# Altium PCB 主板.PCBDOC
Units mil, origin at the board's own origin, x right, y up, seen from the top; angles counter-clockwise.
Board outline 7765 x 6617 mil, 2 copper layers (Top Layer, Bottom Layer); 30 components, 69 nets, 253 pads, 53 vias.
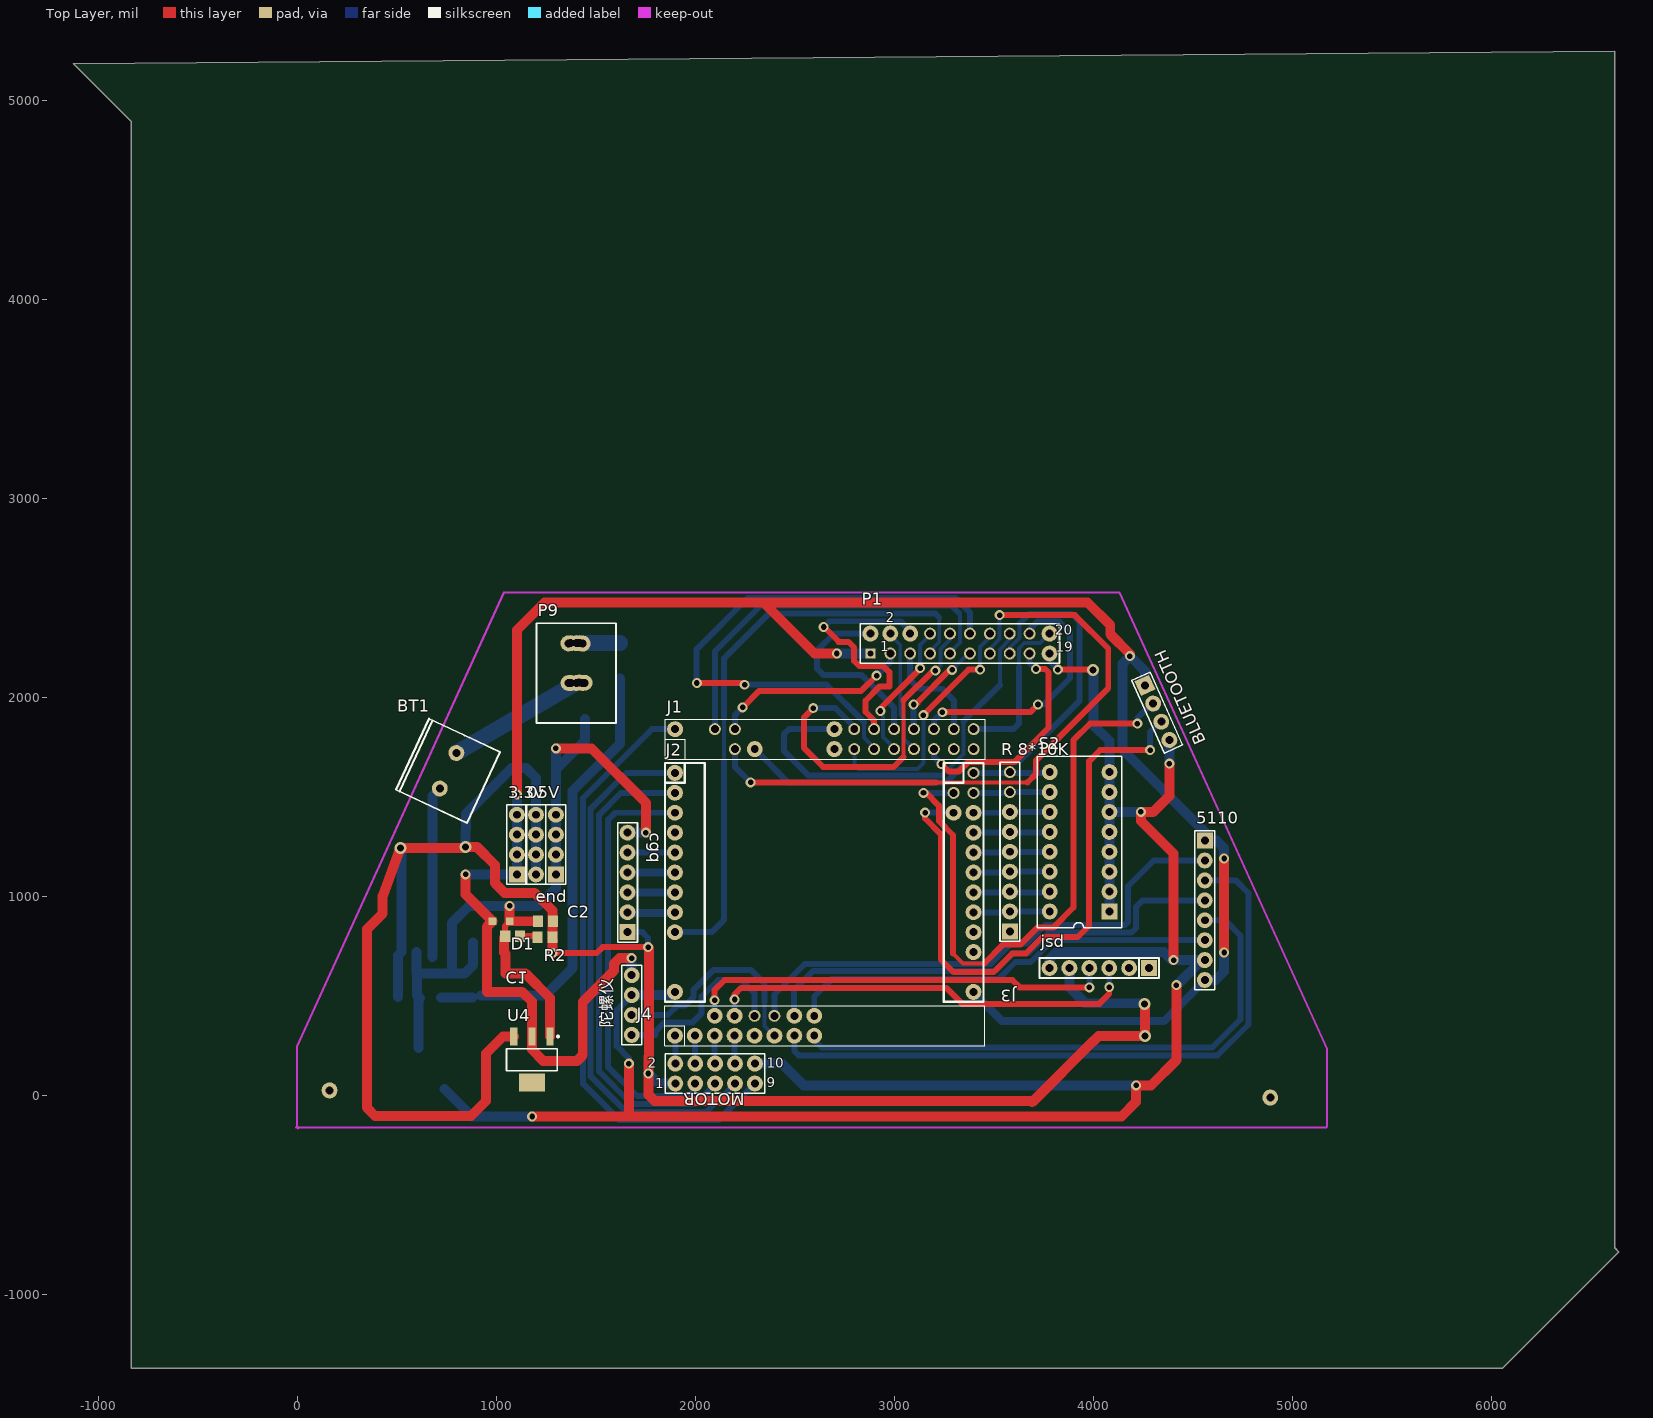
[diagram p0: Top Layer view]
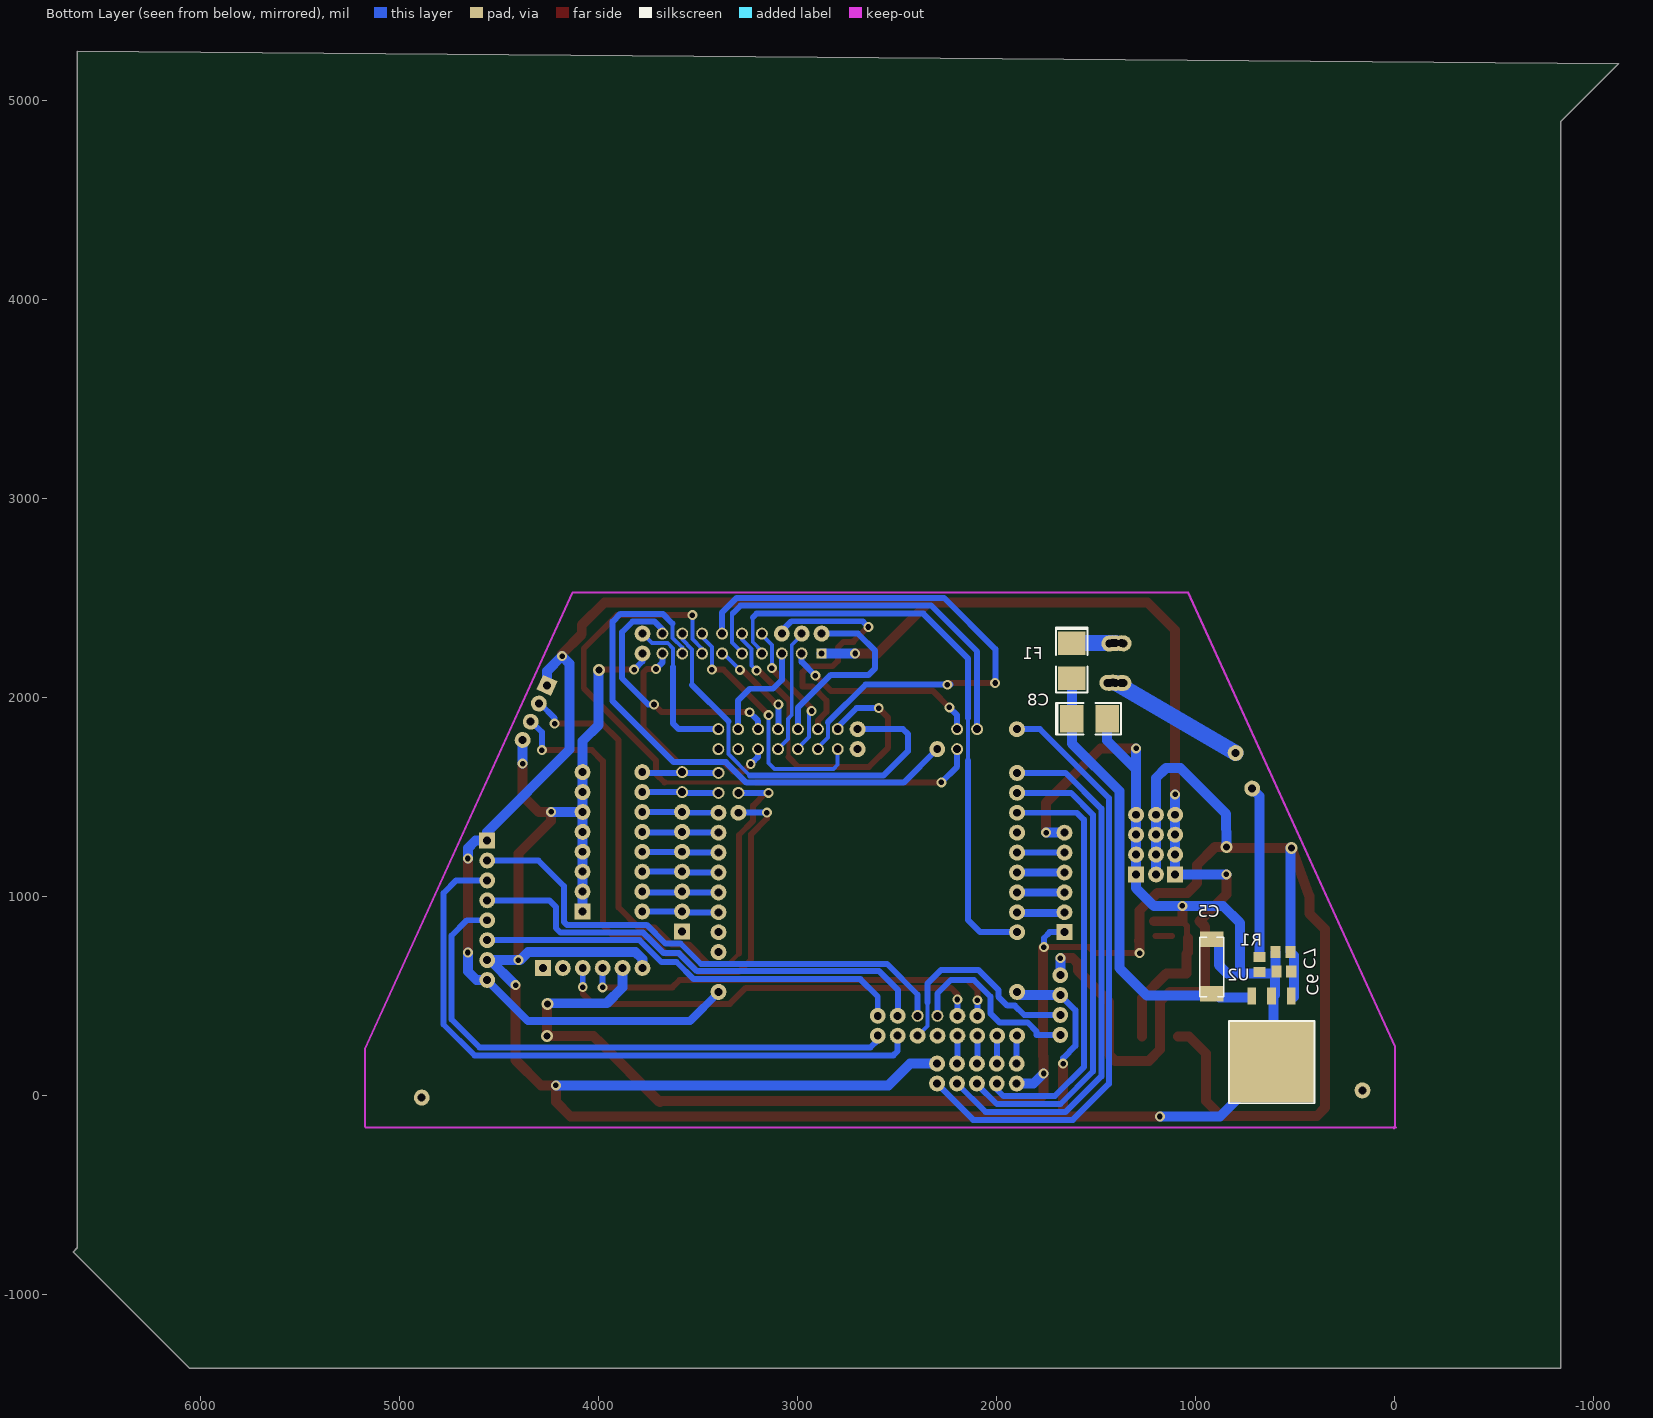
[diagram p1: Bottom Layer view, seen from below]

## Layer stack, top to bottom
Top Layer: signal copper 1.4
Dielectric: dielectric 12.6, FR-4, Dk 4.8
Bottom Layer: signal copper 1.4

## Board outline
-1125,5184 -833,4892 -833,-1371 6055,-1371 6640,-786 6619,-765 6619,5246

## Design rules (kind name [scope] priority, off if disabled: settings)
Clearance [All] p1: gap=5
ComponentClearance [All] p1: gap=10 collisioncheckmode=3 verticalgap=10
PolygonConnect [All] p1: connectstyle=Relief reliefconductorwidth=10 reliefentries=4 polygonreliefangle="90 Angle"
RoutingVias [All] p1: holewidth=28 width=50 viastyle="Through Hole" minholewidth=28 minwidth=50 maxholewidth=28 maxwidth=50
SolderMaskExpansion [All] p1: expansion=4
TestPointUsage [All] p1: valid=0 allowmultiple=FALSE
Testpoint [All] p1: side=15 testpointundercomponent=TRUE minsize=40 maxsize=100 preferedsize=60 minholesize=0 maxholesize=40 preferedholesize=32 testpointgrid=1 style=1023 order=0-112345678
Width [All] p1: maxlimit=196.85 minlimit=7.88 preferedwidth=30
18 further rules are at their usual default settings.

## Components (designator, comment, footprint, x,y, rotation, side; value= is the part's Value field where it differs from the comment)
3.3v "Header 4" HDR1X4#1 1104,1110 r90 top
05V "Header 4" HDR1X4#2 1200,1410 r270 top
5110 "Header 8" HDR1X8 4560,1280 r270 top
BLUETOOTH "BLUE-TOOH" HDR1X4#1 4260,2060 r294 top
BT1 "DC7.2V" 接口2 800,1720 r335 top
C1 "Cap" 10uF的钽电容 1068,875 r180 top
C2 "Cap" 6-0805 1248,875 r0 top
C5 "Cap" CAPM6130X20N 920,680 r270 bottom
C6 "Cap Pol1" 2012[0805] 558,622 r0 bottom
C7 "Cap" M0805 600,720 r180 bottom
C8 "Cap Pol1" FALSE 1623,1892 r180 bottom
cgq "Header 6" HDR1X6 1660,820 r90 top
D1 "LED0" M0805 1120,800 r180 top
end "Header 4" HDR1X4#1 1300,1110 r90 top
F1 "Fuse 1" FALSE 1623,2272 r270 bottom
J1 "CON_16X2_PIN_FIRE" CON-16X2-2.54#1 1899,1740 r0 top locked
J2 "CON_12X2_PIN_FIRE_" CON-12X2-2.54#1 1898,1620 r270 top locked
J3 "CON_12X2_PIN_FIRE_" CON-12X2-2.54#2 3298,1620 r270 top locked
J4 "CON_16X2_PIN_FIRE" CON-16X2-2.54#2 1898,300 r0 top locked
jsd "Header 6" SIP6 4280,640 r180 top
MOTOR "dianji" HDR2X5 1900,60 r0 top
P1 "Header 10X2" HDR2X10 2880,2220 r0 top
P9 "Header 2" 船型开关2 1403,2172 r90 top
R1 "Res2" M0805 680,620 r90 bottom
R2 "Res2" M0805 1208,795 r0 top
"R 8*10K" "Header 9" HDR1X9 3581,824 r90 top
S2 "SW-DIP8" DIP-16-KEY 4081,924 r90 top
U2 "LM2940" LM2940 720,500 r180 bottom
U4 "LM1117" AMS1117——5v电源 1180,180 r270 top
陀螺仪 "Header 4" HDR1X4#2 1681,304 r90 top

## Footprints (in the part's own frame and the unit in brackets; to place one, negate y for a bottom-side part, rotate by r counter-clockwise, add the part's x,y. Pads: shape width x height; smd on the part's side, far side on the other; paste and mask are expansions set on the pad)
6-0805 [mm] "Chip Resistor; Body 2.0 x 1.3 mm (LxW typ)"
  rect 1.3x1.5 smd: 1(-0.95,0) 2(0.95,0)
10uF的钽电容 [mm]
  rect 1x1 smd: 1(0,0) 2(2.21,0)
2012[0805] [mm] "Chip Resistor; Body 2.0 x 1.3 mm (LxW typ)"
  rect 1.3x1.5 smd: 1(-0.95,0) 2(0.95,0)
AMS1117——5v电源 [mm] "SOT223, 4-Leads, Body 6.5x7.3mm (max), Pitch 2.30mm, IPC Medium Density"
  rect 2.3x0.95 smd: 1(-2.95,2.3) 2(-2.95,0) 3(-2.95,-2.3)
  rect 2.3x3.3 smd: 4(2.95,0)
  silkscreen extent -3.07,-3.25 1.4,3.45, body extent -1.9,-3.25 1.9,3.25, height 1.8
CAPM6130X20N [mm] "Molded Capacitor, 2-Leads, Body 6.1x3.0mm, IPC Medium Density"
  rect 2x3 smd: 1(-2.675,0) 2(4.318,0)
  silkscreen extent -2.92,-1.52 4.7,1.52, body extent -3.1,-1.5 4.95,1.5, height 2
CON-12X2-2.54#1 [mil]
  round 80 hole 40 unplated: 1(0,0) 3(100,0) 5(200,0) 7(300,0) 9(400,0) 11(500,0) 13(600,0) 15(700,0) 17(800,0)
  oval 51.18x66.93 on Top Paste: 2(0,100) 4(100,100) 6(200,100) 8(300,100) 10(400,100) 12(500,100) 14(600,100) 16(700,100) 18(800,100) 20(900,100) 21(1000,0) 22(1000,100) 24(1100,100)
  round 80 on Top Paste: 19(900,0)
  round 80 hole 40: 23(1100,0)
  silkscreen extent -50,-50 1150,150
CON-12X2-2.54#2 [mil]
  oval 51.18x66.93 on Top Paste: 1(0,0) 7(300,0) 9(400,0) 11(500,0) 13(600,0) 15(700,0) 17(800,0) 19(900,0) 21(1000,0) 22(1000,100) 23(1100,0)
  round 60 hole 40 unplated: 2(0,100) 3(100,0) 4(100,100)
  round 80 hole 40 unplated: 5(200,0) 6(200,100) 8(300,100) 10(400,100) 12(500,100) 14(600,100) 16(700,100) 18(800,100) 20(900,100) 24(1100,100)
  silkscreen extent -50,-50 1150,150
CON-16X2-2.54#1 [mil]
  oval 51.18x66.93 on Top Paste: 1(0,0) 3(100,0) 4(100,100) 5(200,0) 10(400,100) 11(500,0) 12(500,100) 13(600,0) 14(600,100) 15(700,0) 16(700,100)
  round 80 hole 40 unplated: 2(0,100) 9(400,0) 17(800,0) 18(800,100)
  round 60 hole 40 unplated: 6(200,100) 7(300,0) 8(300,100) 19(900,0) 20(900,100) 21(1000,0) 22(1000,100) 23(1100,0) 24(1100,100) 25(1200,0) 26(1200,100) 27(1300,0) 28(1300,100) 29(1400,0) 30(1400,100) 31(1500,0) 32(1500,100)
  silkscreen extent -50,-50 1557,150
CON-16X2-2.54#2 [mil]
  round 80 hole 40 unplated: 1(0,0) 3(100,0) 5(200,0) 6(200,100) 7(300,0) 8(300,100) 9(400,0) 11(500,0) 13(600,0) 14(600,100) 15(700,0) 16(700,100)
  oval 51.18x66.93 on Top Paste: 2(0,100) 4(100,100) 17(800,0) 18(800,100) 19(900,0) 20(900,100) 21(1000,0) 22(1000,100) 23(1100,0) 24(1100,100) 25(1200,0) 26(1200,100) 27(1300,0) 28(1300,100) 29(1400,0) 30(1400,100) 31(1500,0) 32(1500,100)
  round 60 hole 40 unplated: 10(400,100) 12(500,100)
  silkscreen extent -50,-50 1557,150
DIP-16-KEY [mil] "DIP; 16 Leads; Row Spacing 7.62 mm; Pitch 2.54 mm"
  rect 80x80 hole 40 unplated: 1(0,0)
  round 80 hole 40 unplated: 2(100,0) 3(200,0) 4(300,0) 5(400,0) 6(500,0) 7(600,0) 8(700,0) 9(700,300) 10(600,300) 11(500,300) 12(400,300) 13(300,300) 14(200,300) 15(100,300) 16(0,300)
  silkscreen extent -81,-63 781,362
FALSE [mm]
  rect 3x3.5 smd: 1(0,0) 2(4.5,0)
  silkscreen extent -2,-2 6.3,2
HDR1X4#1 [mil] "Connector; Header; 4 Position"
  rect 80x80 hole 40 unplated: 1(0,0)
  round 80 hole 40 unplated: 2(100,0) 3(200,0) 4(300,0)
  silkscreen extent -50,-50 350,50
HDR1X4#2 [mil] "Connector; Header; 4 Position"
  round 80 hole 40 unplated: 1(0,0) 2(100,0) 3(200,0) 4(300,0)
  silkscreen extent -50,-50 350,50
HDR1X6 [mil] "Connector; Header; 6 Position"
  rect 80x80 hole 40 unplated: 1(0,0)
  round 80 hole 40 unplated: 2(100,0) 3(200,0) 4(300,0) 5(400,0) 6(500,0)
  silkscreen extent -50,-50 550,50
HDR1X8 [mil] "Connector; Header; 8 Position"
  rect 80x80 hole 40 unplated: 1(0,0)
  round 80 hole 40 unplated: 2(100,0) 3(200,0) 4(300,0) 5(400,0) 6(500,0) 7(600,0) 8(700,0)
  silkscreen extent -50,-50 750,50
HDR1X9 [mil] "Connector; Header; 9 Position"
  rect 80x80 hole 40 unplated: 1(0,0)
  round 80 hole 40 unplated: 2(100,0) 3(200,0) 4(300,0) 5(400,0) 6(500,0) 7(600,0)
  round 60 hole 40 unplated: 8(700,0) 9(800,0)
  silkscreen extent -50,-50 850,50
HDR2X5 [mil] "Connector; Header; 5x2 Position"
  round 80 hole 40 unplated: 1(0,0) 2(0,100) 3(100,0) 4(100,100) 5(200,0) 6(200,100) 7(300,0) 8(300,100) 9(400,0) 10(400,100)
  silkscreen extent -50,-50 450,150
HDR2X10 [mil] "Connector; Header; 10x2 Position"
  rect 50x50 hole 30 unplated: 1(0,0)
  round 80 hole 40 unplated: 2(0,100) 4(100,100) 6(200,100) 19(900,0) 20(900,100)
  round 60 hole 40 unplated: 3(100,0) 5(200,0) 7(300,0) 8(300,100) 9(400,0) 10(400,100) 11(500,0) 12(500,100) 13(600,0) 14(600,100) 15(700,0) 16(700,100) 17(800,0) 18(800,100)
  silkscreen extent -50,-50 950,150
LM2940 [mm]
  rect 1.1x2.2 smd: 1(0,0) 2(2.54,0) 3(5.08,0)
  rect 10.8x10.4 smd: 2(2.54,-8.42)
  silkscreen extent -2.9,-13.7 8,-3.2
M0805 [mm]
  rect 1.3x1.5 smd: 1(0,0) 2(1.9,0)
SIP6 [mil]
  rect 80x80 hole 40 unplated: 1(0,0)
  round 80 hole 40 unplated: 2(100,0) 3(200,0) 4(300,0) 5(400,0) 6(500,0)
  silkscreen extent -50,-50 550,50
接口2 [mil]
  round 80 hole 40 unplated: 1(0,0) 2(0,-196.85)
  silkscreen extent -197,-295 197,98
船型开关2 [mil]
  round 80 hole 40 unplated: 1(-100,0) 2(100,0)
  silkscreen extent -300,-200 200,200

## Part data
3.3v 05V end 陀螺仪: "Header, 4-Pin"
5110: "Header, 8-Pin"
BLUETOOTH: library part "Header 4", "Header, 4-Pin"
BT1: library part Battery, "Multicell Battery"
C1 C2 C5 C7: "Capacitor"
C6 C8: "Polarized Capacitor (Radial)"
cgq jsd: "Header, 6-Pin"
D1: "Typical INFRARED GaAs LED"
F1: "Fuse"
J1 J4: "16X2,pin,2.54mm"
J2 J3: "12X2,pin,2.54mm"
MOTOR: library part "Header 5X2", "Header, 5-Pin, Dual row"
P1: "Header, 10-Pin, Dual row"
P9: "Header, 2-Pin"
R1 R2: "Resistor"
"R 8*10K": "Header, 9-Pin"
S2: "4009 Series DIP Switch, Raised actuator"
U4: library part AMS1117

## Free pads (board coordinates)
  round 80 hole 40 unplated: 0(1363,2271) 1(1374,2272) 2(1403,2272) 3(1418,2272) 4(1435,2270) 5(1435,2270) 6(1364,2072) 7(1376,2072) 8(1403,2072) 9(1417,2074) 10(1434,2072) 11(1445,2073) 35(163,25) 36(4889,-11)

## Via types
v1: diameter 50, hole 28, Top Layer to Bottom Layer, 48 vias
v2: diameter 60, hole 35.43, Top Layer to Bottom Layer, 4 vias
v3: diameter 60, hole 35.33, Top Layer to Bottom Layer, 1 vias

## Nets (pads, with @x,y where several pads share a name; then routed paths per layer and width w, separated by ;. In a path a pad name is that pad's centre, name@x,y a point inside that pad or via, vN(x,y) a via of type N, cw(c..) or ccw(c..) an arc to the next point about the centre after c; other vN are vias at no path point)
3.3V: "R 8*10K.1"
3.3V-K60: 3.3v.1 3.3v.2 3.3v.3 3.3v.4 5110.1 5110.8 BLUETOOTH.1 C1.2 J3.24 P1.1 U4.2 陀螺仪.4 | length 11005.9
  Top Layer w50: v1(847,1110) 847,1009 C1.2 953,847 953,520 1131,520 1180,471 1180,230 1236,174 1407,174 1435,202 1435,470 1591.5,626.5 1591.5,661.5 1620,690 v1(1681,690) ; v1(1104,1512) 1104,2338 1243,2477 3971,2477 4085,2363 4085,2317 v1@4184,2218 ; 2343,2477 2600,2220 v1(2712,2220) ; v1@4657,717 v1(4657,1190)
  Bottom Layer w40: J3.24@3396.5,518.5 3541,374 4356,374 4557,575 5110.8@4568,575
  Bottom Layer w50: v1(847,1110) 3.3v.1 v1(1104,1512) ; 陀螺仪.4 v1(1681,690) ; v1(2712,2220) P1.1 ; BLUETOOTH.1@4260,2055 4260,2131 v1(4184,2207) 4146,2169 4146,1738 4560,1324 5110.1 4619,1280 4657,1242 v1(4657,1190) ; 5110.8 4614,580 4657,623 v1@4657,717
  other v1: 4657,718
3V3: 
5V: 05V.1 05V.2 05V.3 05V.4 C2.2 C6.1 C7.2 cgq.1 jsd.5 MOTOR.1 R2.2 U2.3 U4.3 | length 10343.1
  Top Layer w30: v1(1282.8,715.2) 1505.2,715.2 1535,745 v1(1763,745)
  Top Layer w50: v2@841,1242 v2(519,1242) 430,1001 430,914 351,835 351,-62 392,-103 874,-103 949,-28 949,211 1034.14,296.14 U4.3 ; v2(846,1247) 905,1247 994,1158 994,1066 1042,1018 1193,1018 1282.8,928.2 v1(1282.8,715.2) ; C2.2@1282,874 1282,873 C2.2@1282.8,872.2 ; R2.2 R2.2@1285,775 ; 1765,195 1765,3 1796.5,-28.5 3687.5,-28.5 3687.76,-28.24 ; 1767,197 v1@1767,741 ; MOTOR.1@1900,45 MOTOR.1 ; 3693,-34 4004,277 4006,277 4027,298 ; 4028,299 v2(4260,299) v2@4260,460
  Bottom Layer w30: cgq.1 1734,820 1763,791 v1(1763,745)
  Bottom Layer w50: U2.3@508,494 508,702.8 C7.2 v2@525.2,1245 ; v2(846,1247) 848,1415 1077,1644 1151,1644 1200,1595 05V.4 ; v1(1765,110) 1815,60 MOTOR.1 ; jsd.5 3880,542 3959,463 v2@4260,463
  other v2: 4256,460
7.2V: C5.2 C8.1 F1.2 U2.1 | length 2233
  Bottom Layer w50: U2.1@722,491 C5.2@882,491 ; C5.2@923,501 1246,501 1384,639 1384,1529 1623,1768 F1.2
5110_CLK: 5110.2 J4.12 | length 2653.2
  Bottom Layer w30: J4.12 2398,507 2551,660 3486,660 3589,763 3665,763 3759,857 4160,857 4175,872 4175,1052 4303,1180 5110.2
5110_D/C: 5110.4 J4.14 | length 2440.5
  Bottom Layer w30: J4.14@2497,401 2497,530 2591,624 3506.57,624 3597.57,715 3673.57,715 3776.57,818 4192,818 4215,841 4215,947 4248,980 5110.4
5110_DA: 5110.3 J4.13 | length 3337.8
  Bottom Layer w30: J4.13 2498,223 2520,201 4624,201 4779.51,356.51 4779.51,1016.49 4716,1080 5110.3
5110_RST: 5110.6 J4.16 | length 2178.2
  Bottom Layer w20: 4217,778 4217,780
  Bottom Layer w30: J4.16 2598,497 2685,584 3523.14,584 3609.14,670 3685.14,670 3795.14,780 5110.6
5110_S\C\E\: 5110.5 J4.15 | length 2869
  Bottom Layer w20: J4.15@2598,278 J4.15
  Bottom Layer w30: J4.15@2598,278 2635,241 4598,241 4739.51,382.51 4739.51,802.49 4662,880 5110.5
A0: 
A1: 
A2: 
A3: 
A4: 
AD1: cgq.2 J2.15 | length 250
  Bottom Layer w40: cgq.2@1652,917 1660,917 1898,917 J2.15@1902,917
AD2: cgq.3 J2.13 | length 232
  Bottom Layer w40: cgq.3 J2.13@1892,1020
AD3: cgq.4 J2.11 | length 239.4
  Bottom Layer w40: cgq.4 1660,1121 1897,1121 J2.11
AD4: cgq.5 J2.9 | length 238
  Bottom Layer w30: cgq.5 J2.9
AD6: J4.8 jsd.3 | length 2188.1
  Top Layer w20: 4030,461 4031,461
  Top Layer w30: v1(2198,482) 2198,508 2230,540 3261,540 3341,460 4030,460 4080,510 v1(4080,544)
  Bottom Layer w30: J4.8 v1(2198,482) ; v1(4080,544) jsd.3
AD7: J4.6 jsd.4 | length 2145
  Top Layer w30: v1(2098,478) 2098,530 2148,580 3593,580 3630,543 v1(3980,543)
  Bottom Layer w30: J4.6 v1(2098,478) ; v1(3980,543) jsd.4
BGND: BT1.2 R1.2 | length 862
  Bottom Layer w50: R1.2 680,1504.79 BT1.2
COUNT1: J3.18
COUNT2: J3.20
COUNT3: J2.7
COUNT4: J1.31
GND: 5110.7 BLUETOOTH.4 C1.1 C2.1 C5.1 C6.2 C7.1 C8.2 cgq.6 D1.2 end.1 end.2 end.3 end.4 J2.23 jsd.6 MOTOR.10 P1.19 R1.1 S2.1 S2.2 S2.3 S2.4 S2.5 S2.6 S2.7 S2.8 U2.2 U4.1 陀螺仪.3 | length 15668.1
  Top Layer w30: D1.2 1045.2,852.2 C1.1 ; v1(3822,2139) 3996,2139 v3(3998,2137)
  Top Layer w50: D1.2@1040,791 1040,718 1048,710 1048,611.54 1148.46,611.54 1270.55,489.45 U4.1 ; v1(1068,952) C1.1 C2.1 ; v1(1181,-106) 4141,-106 4215,-32 v1(4215,50) 4290,50 4417,177 v1(4417,554) ; end.3 end.3@1310,1320 ; v1(1300,1743) 1479,1743 1752,1470 v1(1752,1320) ; 1667,-102 v1(1667,160) ; v1(4382.02,1666.98) 4382.02,1505.02 4301,1424 v1(4239,1424) 4239,1379 4403,1215 v1(4403,680)
  Bottom Layer w30: v1(1667,160) 1667,187 1605,249 1605,428 陀螺仪.3 ; P1.19 3780,2181 v1(3822,2139) ; 5110.7@4546,680 5110.7
  Bottom Layer w50: C7.1 600,615 C6.2@602,613 ; U2.2@609,238 U2.2@609,499 ; U2.2@618,488 602,504 C6.2@602,613 ; U2.2@740,33 879,-106 v1(1181,-106) ; 778,613 778,867 863,952 1211,952 1300,1041 v1(1300,1743) ; C5.1@883,768 883,654 842,613 C6.2@602,613 ; 1300,1637 1445.83,1782.83 C8.2 ; cgq.6 v1(1752,1320) ; 陀螺仪.3 1882,504 J2.23 ; MOTOR.10 2435,160 2545,50 v1(4215,50) ; jsd.6 3780,685 3816,721 ; 3816,720 4354,720 4394,680 5110.7 ; v3@4000,2137 4000,1861 4081,1780 S2.1 ; S2.6 v1(4239,1424) ; v1(4382.02,1666.98) BLUETOOTH.4 ; v1@4424.5,558.5 5110.7@4546,680
K1: "R 8*10K.2" J3.16 S2.16 | length 390.3
  Bottom Layer w30: J3.16 3577,920 ; S2.16 3581,924 ; 3577,920 3581,924 ; 3577,920 3581,924
K2: "R 8*10K.3" J3.14 S2.15 | length 384.7
  Bottom Layer w20: S2.15@3777,1020 S2.15
  Bottom Layer w30: J3.14 3581,1020 S2.15@3777,1020
K3: "R 8*10K.4" J3.12 S2.14 | length 384.7
  Bottom Layer w20: 3577,1120 3581,1124
  Bottom Layer w30: J3.12 3577,1120 ; 3581,1124 S2.14
K4: "R 8*10K.5" J3.10 S2.13 | length 372.7
  Bottom Layer w20: 3577,1220 3581,1224
  Bottom Layer w30: J3.10 3577,1220 ; 3581,1224 S2.13@3769,1224
K5: "R 8*10K.6" J3.8 S2.12 | length 384.7
  Bottom Layer w20: 3581,1320 3577,1320 3581,1324
  Bottom Layer w30: J3.8 3577,1320 ; 3581,1320 S2.12@3777,1320
K6: "R 8*10K.7" J3.6 S2.11 | length 384.7
  Bottom Layer w20: 3577,1420 3581,1424
  Bottom Layer w30: J3.6 3577,1420 ; 3581,1424 S2.11
K7: "R 8*10K.8" J3.4 S2.10 | length 384.7
  Bottom Layer w20: 3577,1520 3581,1524
  Bottom Layer w30: J3.4 3577,1520 ; 3581,1524 S2.10
K8: "R 8*10K.9" J3.2 S2.9 | length 390.3
  Bottom Layer w20: 3581,1620 3577,1620 3581,1624 ; S2.9@3777,1620 S2.9
  Bottom Layer w30: J3.2 3577,1620 ; 3581,1620 S2.9@3777,1620
NetBT1_1: BT1.1 P9.1 pad.6 pad.7 pad.8 pad.9 pad.10 pad.11 | length 698.2
  Bottom Layer w80: BT1.1 P9.1
NetD1_1: D1.1 R2.1 | length 83
  Top Layer w30: D1.1 R2.1@1203,800
NetF1_1: F1.1 P9.2 pad.0 pad.1 pad.2 pad.3 pad.4 pad.5 | length 220
  Bottom Layer w80: P9.2 F1.1
PTA25: J1.32 P1.20 | length 800.7
  Bottom Layer w20: 3626,2152 3626,2245 3653,2272 3731,2272 3779,2320 P1.20
  Bottom Layer w30: J1.32 3598,1840 3626,1868 3626,2152
PTA26: J1.28 P1.18 | length 1319.7
  Top Layer w20: P1.18@3677,2311 3677,2320 P1.18
  Top Layer w30: v1@3242.5,1925.5 3683.5,1925.5 v1(3722,1964)
  Bottom Layer w30: J1.28 3199,1882 v1@3242.5,1925.5 ; P1.18 3680,2341 3719,2380 3830,2380 3883,2327 3883,2096 3751,1964 v1(3722,1964)
  other v1: 3242,1925
PTA27: J1.30 P1.5 | length 612
  Bottom Layer w20: 3080,2167 P1.5 ; J1.30 J1.30@3313,1854
  Bottom Layer w30: P1.5 3080,2087 3124,2043 3241,2043 3299,1985 J1.30
PTA28: J1.27 P1.17 | length 1176.1
  Top Layer w30: v1(3236,1665) 3274,1627 3324,1627 3371,1674 3602,1674 3775,1847 3775,2125 3758,2142 v1(3712,2142)
  Bottom Layer w30: J1.27 3199,1701 3217,1683 3218,1683 v1(3236,1665) ; P1.17 3680,2174 v1(3712,2142)
PTA29: J1.26 P1.11 | length 528.5
  Top Layer w20: v1(3097,1964) 3122,1969
  Top Layer w30: v1@3110,1969 3279,2138 v1(3291,2138)
  Bottom Layer w20: v1(3291,2138) 3373,2220 P1.11
  Bottom Layer w30: J1.26@3097,1835 v1(3097,1964)
PTB0: J1.24 P1.2 | length 1001.6
  Bottom Layer w20: P1.2@2880,2304 P1.2 P1.2@2895,2320
  Bottom Layer w30: P1.2 2697,2320 2611,2234 2611,2146 2644,2113 2834,2113 2999,1948 J1.24
PTB1: J1.25 P1.4 | length 629.3
  Bottom Layer w20: P1.4 2980,2313 3030,2263 3030,1911 3049,1892 3049,1790 J1.25
PTB2: J1.22 P1.6 | length 1331.9
  Top Layer w20: P1.6@3077,2320 P1.6
  Top Layer w30: v1(2645,2353) 2649,2353 2720,2282 2720,2278 2771,2278 2798,2251 2798,2183 2825,2156 2945,2156 2975,2126 2975,2055 2927,2055 2856,1984 2856,1926 2899,1883 J1.22
  Bottom Layer w30: v1(2645,2353) 2673,2381 2673,2382 3032,2382 3080,2334 P1.6
PTB3: J1.23 P1.8 | length 722.1
  Top Layer w20: P1.8@3180,2307 P1.8
  Top Layer w30: v1(2930,1931) 2930,1944 v1@3130,2144
  Bottom Layer w20: v1(2930,1931) 2944,1917 2944,1801 2999,1746 J1.23 ; v1(3130,2147) 3130,2262 3180,2312 P1.8
PTB4: J1.20 P1.10 | length 1776.7
  Top Layer w20: 3046,1699 3046,1985 ; P1.10@3280,2303 P1.10
  Top Layer w30: v1(2593,1946) 2593,1945 2546,1898 2546,1747 2643,1650 2997,1650 3046,1699 ; 3046,1985 3195,2134 v1(3206,2134)
  Bottom Layer w20: v1(3206,2134) 3232,2160 3232,2243 3280,2291 P1.10
  Bottom Layer w30: v1(2593,1946) 2704,1946 2799,1851 J1.20
PTB5: J1.21 P1.12 | length 2903.4
  Top Layer w20: v1(2008,2072) v1@2017,2063
  Top Layer w30: v1(2008,2072) 2239,2072 v1(2248,2063)
  Bottom Layer w20: v1@2007,2073 v1(2008,2072) ; 2849,1874 2849,1798 2899,1748 J1.21 J1.21@2889,1740
  Bottom Layer w30: v1@2007,2073 2007,2242 2265,2500 3307,2500 3380,2427 P1.12 ; v1@2233,2064 2659,2064 2849,1874
PTB6: J1.19 P1.14 | length 1278.9
  Top Layer w20: P1.14@3480,2302 P1.14
  Top Layer w30: v1@3145,1911 3373,2139 v1(3431,2139)
  Bottom Layer w20: J1.19 2799,1662 2821,1640 3117,1640 3146,1669 v1(3146,1910) ; v1@3431,2129 3431,2253 P1.14@3480,2302
PTB7: J1.18 P1.16 | length 2056.5
  Top Layer w20: P1.16@3580,2309 P1.16
  Bottom Layer w20: 3241,1608 3348,1715 3348,1879 ; 3530,2061 3530,2240 3580,2290 P1.16
  Bottom Layer w30: J1.18 2471,1840 2447,1816 2447,1729 2568,1608 3241,1608 ; 3348,1879 3530,2061
PTB20: J1.8 P1.3 | length 1004
  Top Layer w30: v1(2238,1949) 2321,2032 2834,2032 v1(2911,2109)
  Bottom Layer w30: J1.8 2199,1910 v1(2238,1949) ; v1(2911,2109) 2980,2178 P1.3
PTB21: J1.9 P1.15 | length 2788.6
  Top Layer w20: P1.15@3578,2229 3578,2220 P1.15
  Bottom Layer w20: P1.15 3580,2249 3630,2299 3630,2371
  Bottom Layer w30: J1.9 2468,1571 3258,1571 3361,1674 3623,1674 3930,1981 3930,2380 3891,2419 3678,2419 3630,2371
PTB22: J1.6 P1.9 | length 2936
  Bottom Layer w20: 2363.5,2464 3290,2464 3331,2423 3331,2276 3280,2225 P1.9
  Bottom Layer w30: J1.6 2099,2230 2330,2461 3287,2461 3325,2423
PTB23: J1.7 P1.13 | length 4055.4
  Top Layer w20: 2415,1572 3661,1572 3665,1576 ; P1.13 P1.13@3480,2227
  Top Layer w30: v1(2278,1573) 3209,1573 ; v1(3529,2413) 3907,2413 4075,2245 4075,2046 3711,1682 3711,1614 3669,1572
  Bottom Layer w20: P1.13 3480,2244 3529,2293 v1@3529,2409
  Bottom Layer w30: J1.7 2199,1652 v1(2278,1573)
PTD0: J2.17 P1.7 | length 2968.4
  Bottom Layer w20: 2145,1682 2145,1895 ; P1.7 3180,2231 3226,2277 3226,2401
  Bottom Layer w30: J2.17 2083,820 2145,882 2145,1682 ; 2145,1895 2145,2196 2369,2420 3207,2420 3226,2401
PWM1: J2.5 MOTOR.3 | length 2133.2
  Bottom Layer w30: J2.5 1598,1420 1563,1385 1563,142 1708,-3 1967,-3 2000,30 MOTOR.3
PWM2: J2.3 MOTOR.5 | length 2411.5
  Bottom Layer w30: J2.3 1627,1520 1517,1410 1517,120 1680,-43 2000,-43 2100,57 MOTOR.5
PWM3: J2.1 MOTOR.7 | length 2700.5
  Bottom Layer w30: J2.1 1654,1620 1475,1441 1475,96 1654,-83 2057,-83 MOTOR.7
PWM4: J1.2 MOTOR.9 | length 3056.3
  Bottom Layer w20: MOTOR.9@2300,58 MOTOR.9
  Bottom Layer w30: J1.2 1783,1840 1437,1494 1437,58 1618,-123 2119,-123 MOTOR.9@2300,58
RES: 
RXD: BLUETOOTH.3 J3.5 | length 3103.2
  Top Layer w30: v1(3155,1421) 3155,1391 3234,1312 3234,683 3297,620 3499,620 3592,713 3661,713 3744,796 3921,796 3978.61,853.61 3978.61,1679 4034.61,1735 v1(4285,1735)
  Bottom Layer w30: v1(3155,1421) J3.5@3297,1421 ; v1(4285,1735) 4285,1825 4337.29,1877.29 BLUETOOTH.3
SCL: J4.11 陀螺仪.2 | length 1090.6
  Bottom Layer w20: 2349,466 2349,349 J4.11
  Bottom Layer w30: 陀螺仪.2 1862,404 1909,451 1947,451 1992,496 1992,530 2091,629 2281,629 2349,561 2349,466
SDA: J4.10 陀螺仪.1 | length 934.4
  Bottom Layer w20: 陀螺仪.1@1679,296 陀螺仪.1@1681,296
  Bottom Layer w30: 陀螺仪.1 1801,304 1801,322 1846,367 1987,367 2032,412 2032,497 2115,580 2231,580 2298,513 J4.10
T1: J4.1 MOTOR.2 | length 154
  Bottom Layer w20: J4.1@1895,295 J4.1@1895,314
  Bottom Layer w30: MOTOR.2 J4.1@1900,295
T2: J4.3 MOTOR.4 | length 148
  Bottom Layer w20: MOTOR.4@2004,150 MOTOR.4@2004,160
  Bottom Layer w30: MOTOR.4 J4.3@2000,298
T3: J4.5 MOTOR.6 | length 138
  Bottom Layer w30: MOTOR.6@2098,162 J4.5
T4: J4.7 MOTOR.8 | length 140
  Bottom Layer w20: MOTOR.8 MOTOR.8@2200,162
  Bottom Layer w30: MOTOR.8@2198,162 J4.7
TXD: BLUETOOTH.2 J3.3 | length 3103.4
  Top Layer w20: 3295,713 3346,662 3451,662
  Top Layer w30: v1(3147,1520) 3160,1520 3224,1456 3224,1379 3295,1308 3295,713 ; 3451,662 3548,759 3635,759 3719,843 3799,843 3900,944 3900,1785 3983,1868 v1(4221,1868)
  Bottom Layer w30: v1(3147,1520) J3.3 ; v1(4221,1868) 4221,1895 4294.65,1968.65 BLUETOOTH.2
pads on no net: J1.1 J1.3 J1.4 J1.5 J1.10 J1.11 J1.12 J1.13 J1.14 J1.15 J1.16 J1.17 J1.29 J2.2 J2.4 J2.6 J2.8 J2.10 J2.12 J2.14 J2.16 J2.18 J2.19 J2.20 J2.21 J2.22 J2.24 J3.1 J3.7 J3.9 J3.11 J3.13 J3.15 J3.17 J3.19 J3.21 J3.22 J3.23 J4.2 J4.4 J4.9 J4.17 J4.18 J4.19 J4.20 J4.21 J4.22 J4.23 J4.24 J4.25 J4.26 J4.27 J4.28 J4.29 J4.30 J4.31 J4.32 jsd.1 jsd.2 U4.4
copper on no net: | length 10
  Top Layer w20: 4169,641 4179,641

## Keep-outs
Keep-Out Layer:
  lines w10: -6,-162 5172,-162 ; 0,-5 0,245 1039.12,2527.48 4129.38,2527.48 ; 0,0 0,-151 4,-166 ; 4131.04,2525.82 5175,232 5175,-155

## Text inside footprints (layer, text, board x,y; h text height)
MOTOR: Top Overlay "10" at 2360,140 h50; Top Overlay "9" at 2360,40 h50; Top Overlay "1" at 1800,37 h50; Top Overlay "2" at 1762,140 h50
P1: Top Overlay "2" at 2958,2377 h50; Top Overlay "1" at 2929,2231 h50; Top Overlay "19" at 3811,2229 h50; Top Overlay "20" at 3809,2314 h50